# Altium PCB EE209_Team08PTH.PcbDoc
Units mm, origin at the board's own origin, x right, y up, seen from the top; angles counter-clockwise.
Board outline 108.71 x 100.84 mm, 2 copper layers (Top Layer, Bottom Layer); 51 components, 39 nets, 180 pads, 0 vias.
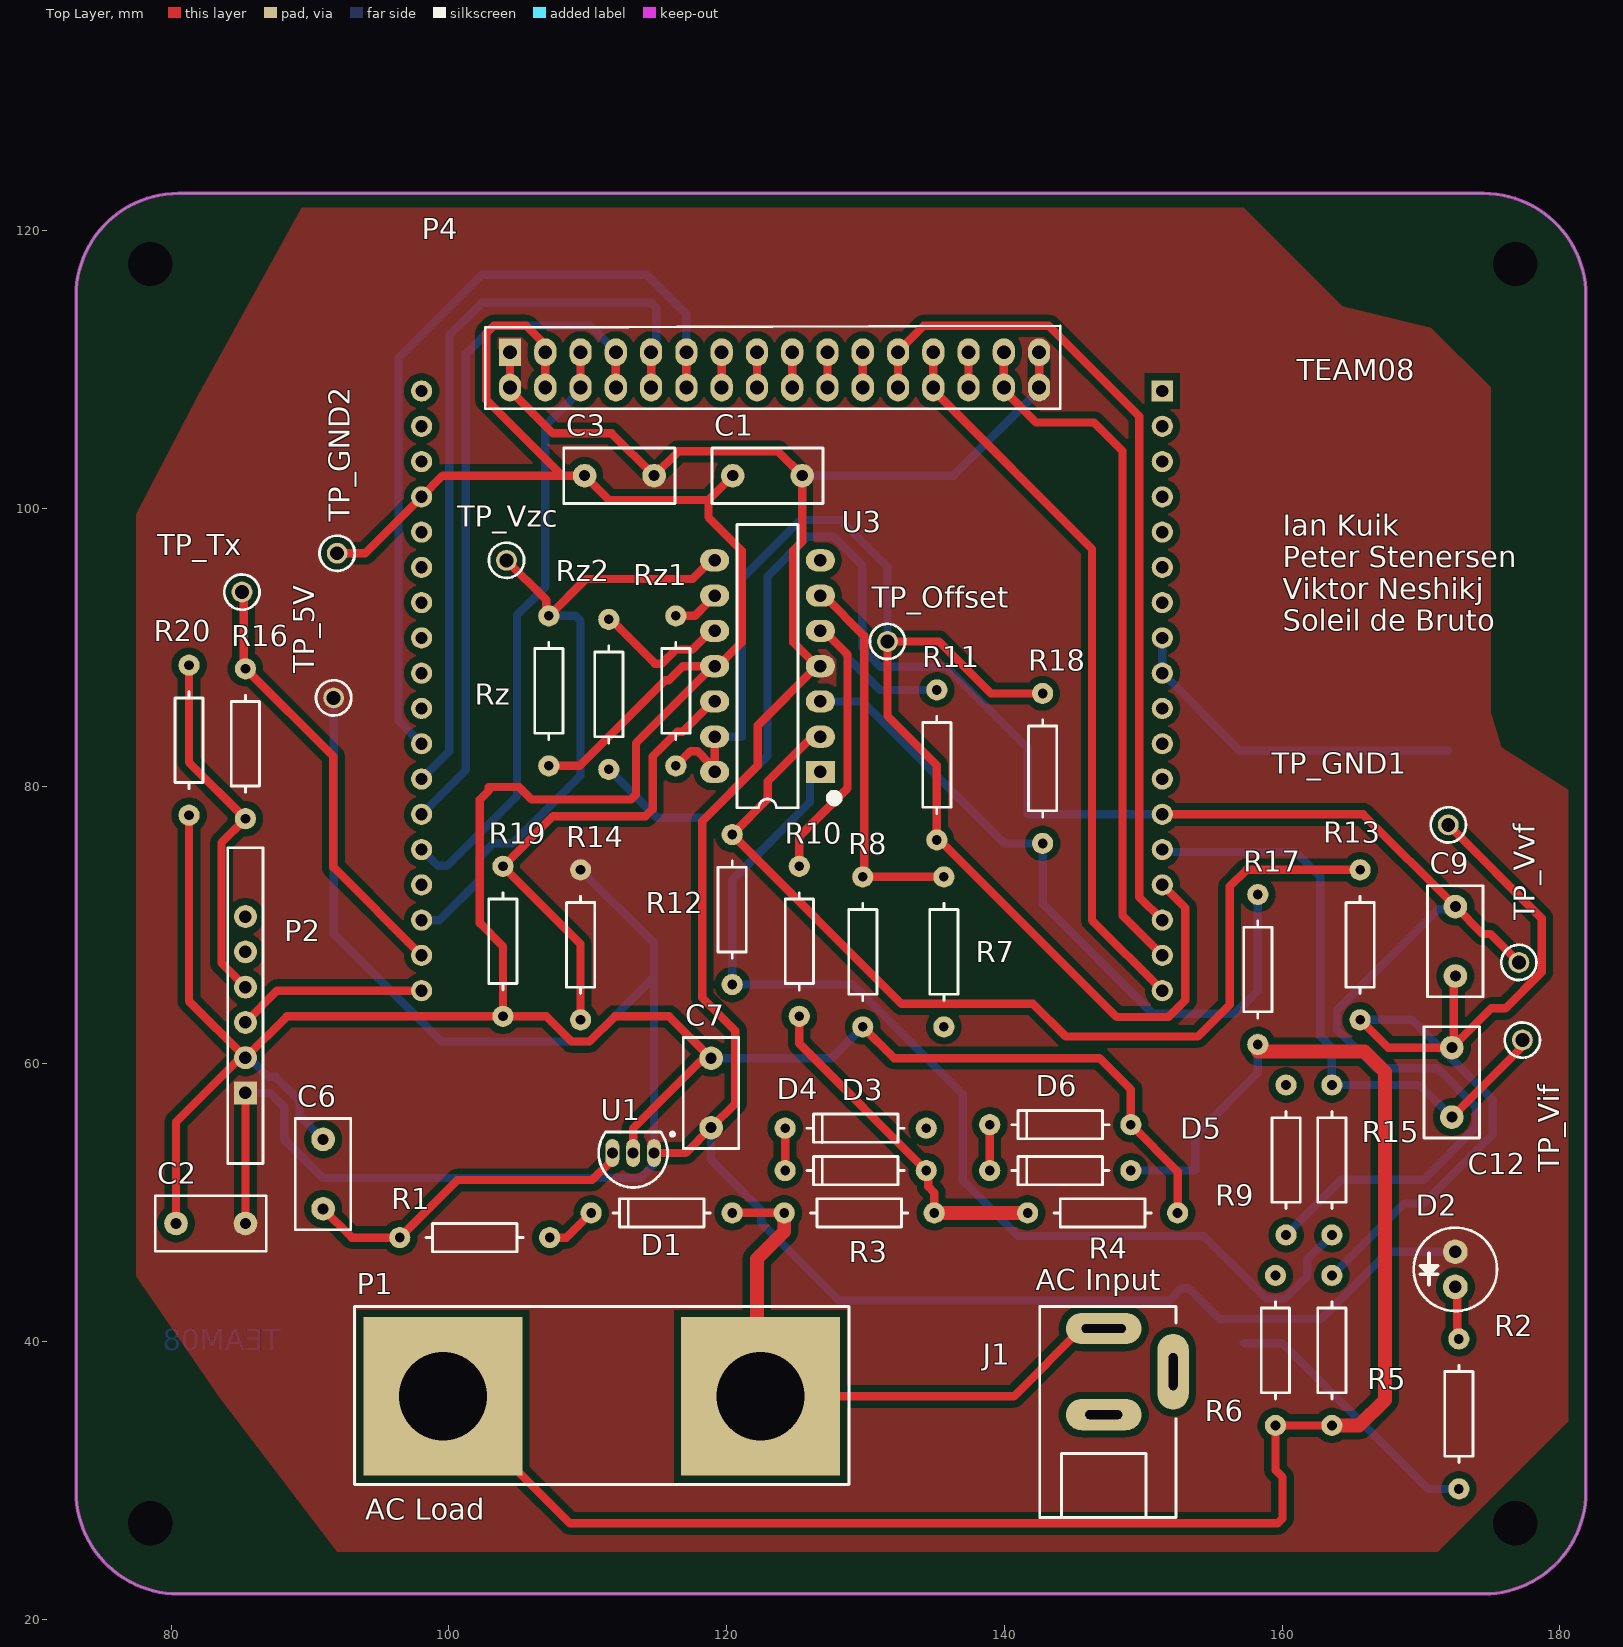
[diagram p0: Top Layer view]
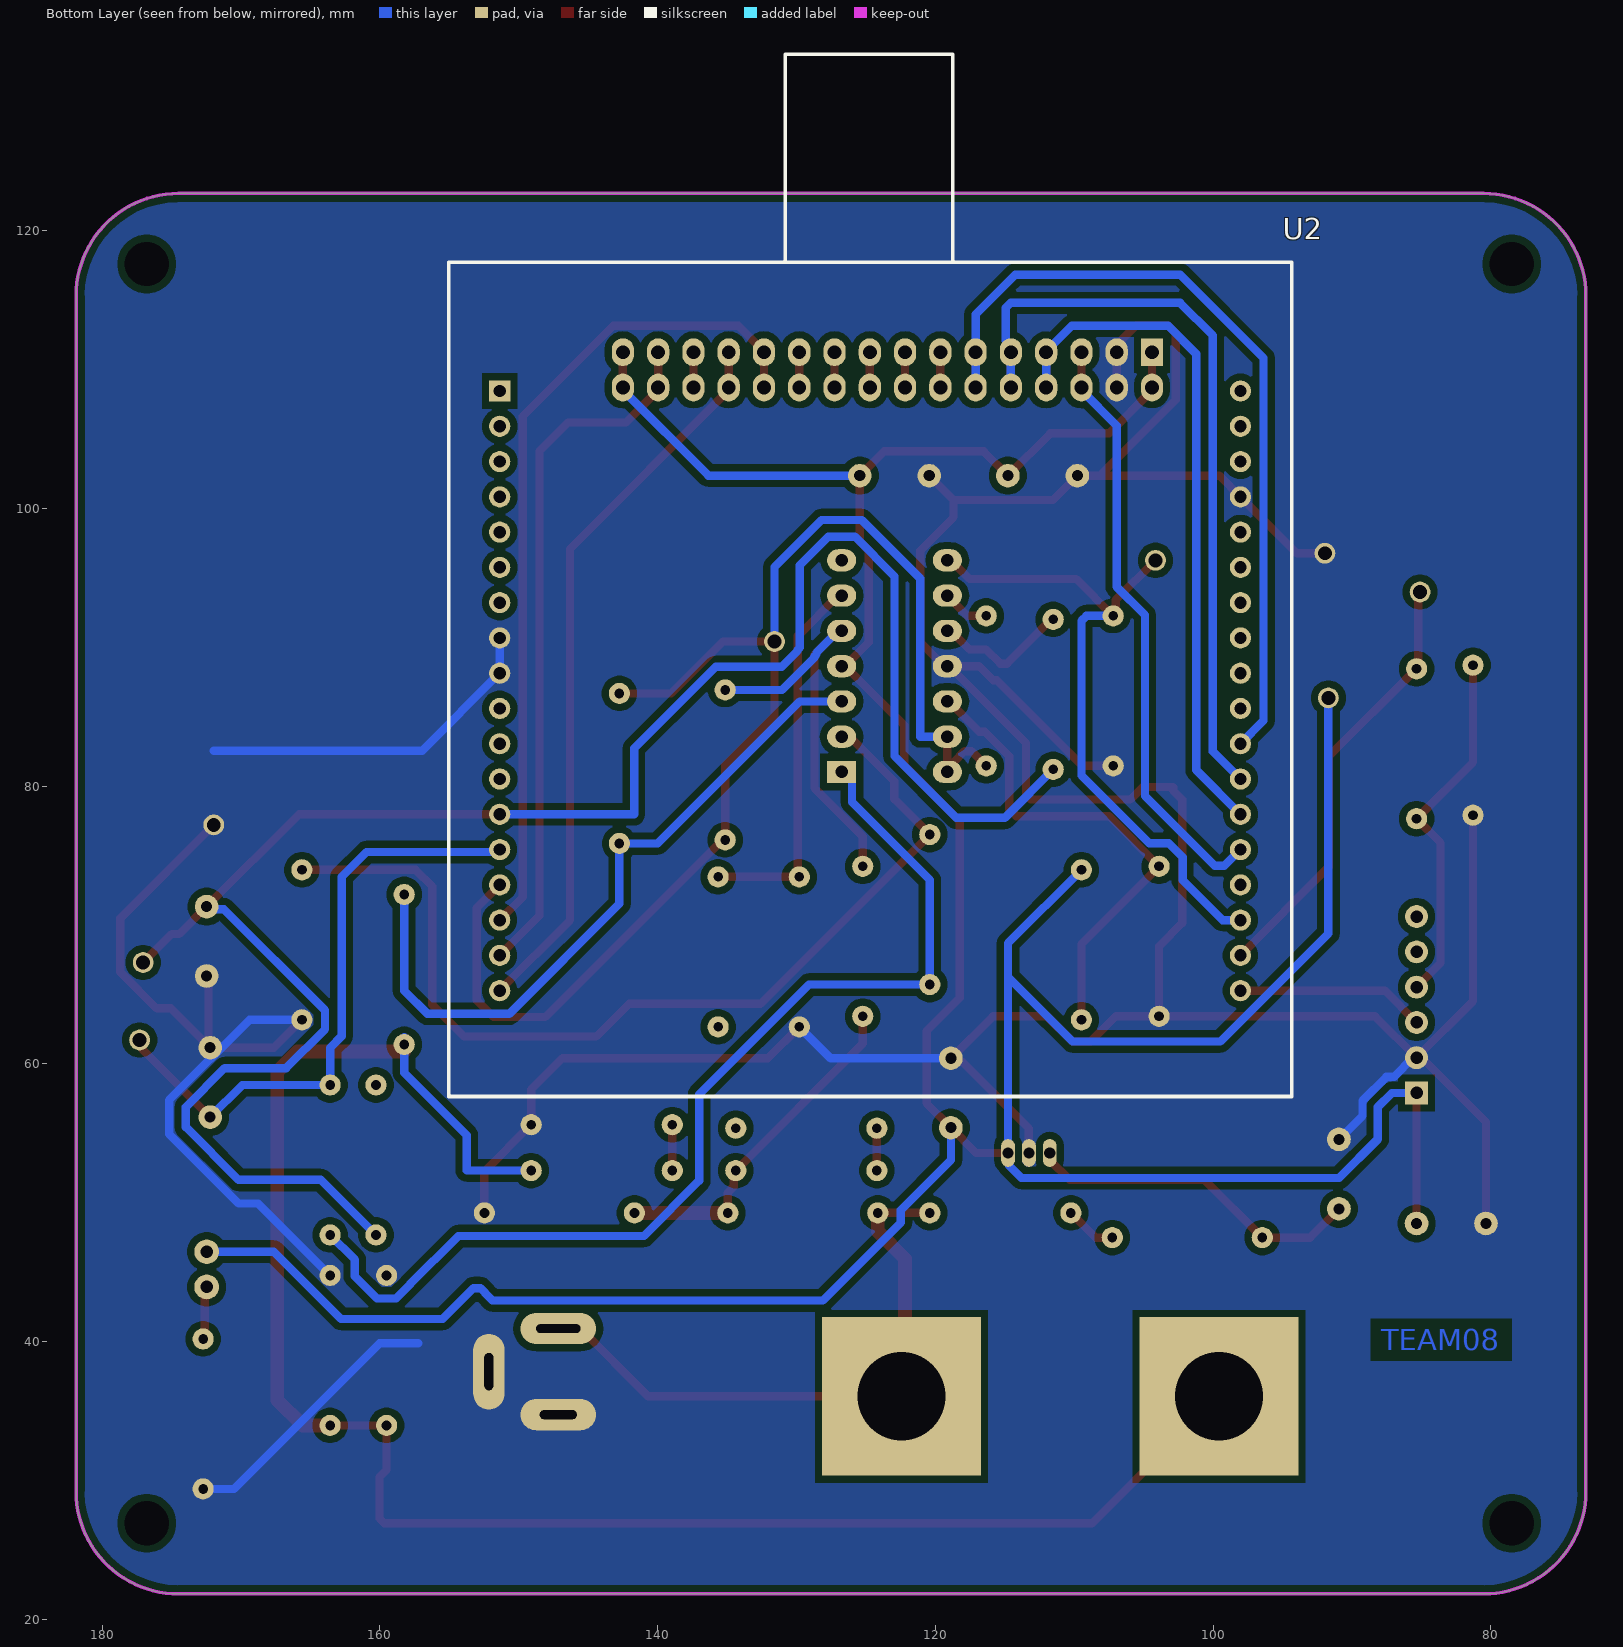
[diagram p1: Bottom Layer view, seen from below]
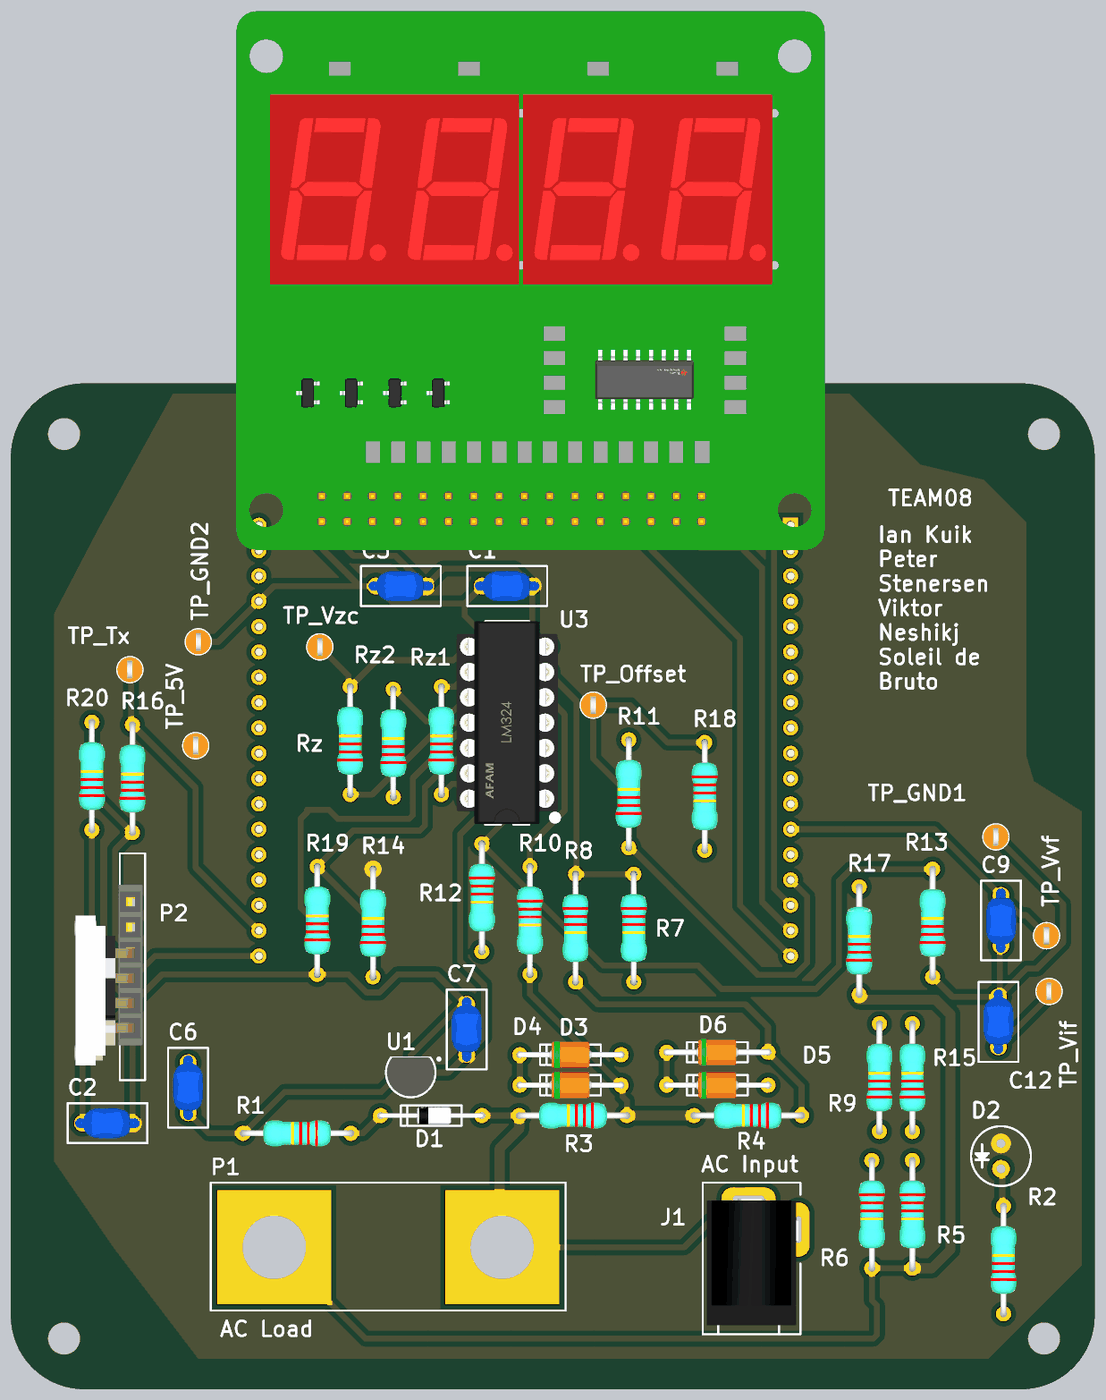
[diagram p2: 3D render of the assembled board from above, using the file's embedded part models]

## Layer stack, top to bottom
Top Solder: solder mask 0.0102, Solder Resist, Dk 3.5
Top Layer: signal copper 0.0356
Dielectric 1: dielectric 0.32, FR-4, Dk 4.8
Bottom Layer: signal copper 0.0356
Bottom Solder: solder mask 0.0102, Solder Resist, Dk 3.5

## Board outline
73.152,29.21 73.152,115.316 cw(c80.518,115.316) 80.518,122.682 174.498,122.682 cw(c174.498,115.316) 181.864,115.316 181.864,29.21 cw(c174.498,29.21) 174.498,21.844 80.518,21.844 cw(c80.518,29.21)

## Design rules (kind name [scope] priority, off if disabled: settings)
BoardOutlineClearance [All] p1: gap=0.5 ignorepadtopadclearanceinfootprint=FALSE
Clearance [All] p1: gap=0.5 ignorepadtopadclearanceinfootprint=FALSE
Height [All] p1: minheight=0 maxheight=50 prefheight=12.7
HoleSize [All] p1: absolutevalues=TRUE maxlimit=10 minlimit=0.4 maxpercent=80.000 minpercent=20.000
MinimumAnnularRing [All] p1: minimumring=0.076
MinimumSolderMaskSliver [All] p1: minsoldermaskwidth=0.1
PlaneConnect [All] p1: planeconnectstyle=Relief reliefexpansion=0.6 reliefentries=4 reliefconductorwidth=0.6 reliefairgap=0.4
PolygonConnect PolygonConnect_1 [All] p1: connectstyle=Direct reliefconductorwidth=0.6 reliefentries=4 polygonreliefangle="90 Angle" airgapwidth=0.4
RoutingVias [All] p1: holewidth=0.6 width=1 viastyle="Through Hole" minholewidth=0.5 minwidth=0.8 maxholewidth=1 maxwidth=2
SMDToCorner [All] p1: distance=157480
SilkToSilkClearance [All] p1: silktosilkclearance=0.1
SilkToSolderMaskClearance [IsPad] p1: minsilkscreentomaskgap=0.1 clearancetoexposedcopper=TRUE
SolderMaskExpansion [All] p1: expansion=0.102 istentingtop=FALSE
Width [All] p1: maxlimit=10 minlimit=0.4 preferedwidth=0.6
24 further rules are at their usual default settings.

## Classes and differential pairs
component class EE209_Schematic: C1 C2 C3 C6 C7 C9 C12 D1 D2 D3 D4 D5 D6 J1 P1 P2 P4 R6 R9 R10 R11 R12 R13 R14 R15 R16 R17 R18 R19 R20 Rz Rz1 Rz2 TP_5V TP_GND1 TP_GND2 TP_Offset TP_Tx TP_Vif TP_Vvf TP_Vzc U2 U3

## Components (designator, comment, footprint, x,y, rotation, side; value= is the part's Value field where it differs from the comment)
C1 "100nF" CCAP-5P0 122.936,102.362 r180 top
C2 "100nF" CCAP-5P0 82.844,48.514 r180 top
C3 "100nF" CCAP-5P0 112.268,102.362 r180 top
C6 "47uF" CCAP-5P0 90.932,52.07 r90 top
C7 "10uF" CCAP-5P0 118.872,57.912 r90 top
C9 "3.9nF" CCAP-5P0 172.466,68.834 r270 top
C12 "3.9nF" CCAP-5P0 172.212,58.674 r90 top
D1 "1N4148" AXIAL-DIODE-0.4 115.316,49.276 r180 top
D2 "Green" LED 172.466,45.212 r270 top
D3 "BZX79-CXVX" AXIAL-Zener-0.4 129.286,52.324 r180 top
D4 "BZX79-CXVX" AXIAL-Zener-0.4 129.286,55.372 r180 top
D5 "BZX79-CXVX" AXIAL-Zener-0.4 144.018,52.324 r180 top
D6 "BZX79-CXVX" AXIAL-Zener-0.4 144.018,55.626 r180 top
J1 "DC barrel jack" AC-Socket 147.146,34.945 r90 top value=socket
P1 "Dual Banana Plugs" "Dual Banana Plug" 110.998,36.068 r180 top
P2 "BLE Module Header" HM10_HDR1X6 85.344,57.912 r90 top
P4 "Display" Display 122.174,109.982 r180 top
R1 "33" AXIAL-0.4 101.854,47.498 r180 top
R2 "100" AXIAL-0.4 172.72,34.798 r90 top
R3 "100k" AXIAL-0.4 129.54,49.276 r180 top
R4 "4.8k" AXIAL-0.4 147.066,49.276 r180 top value=1k2
R5 "1" AXIAL-0.4 163.576,39.37 r270 top
R6 "1" AXIAL-0.4 159.512,39.37 r270 top
R7 "100k" AXIAL-0.4 135.636,68.072 r270 top
R8 "100k" AXIAL-0.4 129.794,68.072 r270 top
R9 "4.8k" AXIAL-0.4 160.274,53.086 r90 top
R10 "95..4k" AXIAL-0.4 125.222,68.834 r270 top
R11 "100k" AXIAL-0.4 135.128,81.534 r90 top
R12 "12k" AXIAL-0.4 120.396,71.12 r270 top
R13 "6.8k" AXIAL-0.4 165.608,68.58 r90 top value=10k
R14 "53.86k" AXIAL-0.4 109.474,68.58 r90 top
R15 "4.8k" AXIAL-0.4 163.576,53.086 r90 top
R16 "12" AXIAL-0.4 85.344,83.058 r90 top
R17 "6.8k" AXIAL-0.4 158.242,66.802 r90 top value=10k (schematic designator R7)
R18 "12k" AXIAL-0.4 142.748,81.28 r270 top value=100k (schematic designator R8)
R19 "39k" AXIAL-0.4 103.886,68.834 r90 top
R20 "22" AXIAL-0.4 81.28,83.312 r90 top
Rz "100k" AXIAL-0.4 107.188,86.868 r90 top
Rz1 "100k" AXIAL-0.4 116.332,86.868 r90 top
Rz2 "100k" AXIAL-0.4 111.506,86.614 r90 top
TP_5V "5003" TP_TH 91.694,86.36 r90 top
TP_GND1 "5003" TP_TH 171.958,77.216 r90 top
TP_GND2 "5003" TP_TH 91.948,96.774 r90 top
TP_Offset "5003" TP_TH 131.572,90.424 r90 top
TP_Tx "5003" TP_TH 85.09,93.98 r90 top
TP_Vif "5003" TP_TH 177.292,61.722 r270 top
TP_Vvf "5003" TP_TH 177.038,67.31 r90 top
TP_Vzc "5003" TP_TH 104.14,96.266 r90 top
U1 "L78L05ACZ" TO-92 113.26,53.594 r90 top
U2 "ATmega328PB Xplained Mini Header" "ATmeg328P Xplained" 124.694,86.868 r180 bottom
U3 "LM324" DIP-14 122.936,88.646 r180 top

## Footprints (in the part's own frame and the unit in brackets; to place one, negate y for a bottom-side part, rotate by r counter-clockwise, add the part's x,y. Pads: shape width x height; smd on the part's side, far side on the other; paste and mask are expansions set on the pad)
AC-Socket [mm]
  oval 2.25x5.45 hole 0.635 slot 3.175 at 90 deg: 1(6,0)
  oval 5.45x2.25 hole 0.635 slot 2.667 at 0 deg: 2(2.9,-5)
  oval 2.25x5.45 hole 0.635 slot 2.667 at 90 deg: 3(-0.2,0)
  silkscreen extent -7.6,-5.2 7.6,4.6, body extent -6.7,-5 6,4.2, height 10.5
"ATmeg328P Xplained" [mil]
  rect 60x60 hole 35: 1(-1050,850)
  round 60 hole 35: 2(-1050,750) 3(-1050,650) 4(-1050,550) 5(-1050,450) 6(-1050,350) 7(-1050,250) 8(-1050,150) 9(-1050,50) 10(-1050,-50) 11(-1050,-150) 12(-1050,-250) 13(-1050,-350) 14(-1050,-450) 15(-1050,-550) 16(-1050,-650) 17(-1050,-750) 18(-1050,-850) 19(1050,-850) 20(1050,-750) 21(1050,-650) 22(1050,-550) 23(1050,-450) 24(1050,-350) 25(1050,-250) 26(1050,-150) 27(1050,-50) 28(1050,50) 29(1050,150) 30(1050,250) 31(1050,350) 32(1050,450) 33(1050,550) 34(1050,650) 35(1050,750) 36(1050,850)
  silkscreen extent -1195,-1150 1195,1805, body extent -1201,-1150 1161,1845, height 452
AXIAL-0.4 [mm]
  round 1.524 hole 0.7: 1(-5.4,0) 2(5.4,0)
  silkscreen extent -3.5,-1.02 3.5,1.02, body extent -5.7,-1.3 5.7,1.3, height 2.7
AXIAL-DIODE-0.4 [mil]
  round 60 hole 27.56: 1(-200,0) 2(200,0)
  silkscreen extent -138,-40 138,40, body extent -209,-34 209,34, height 73
AXIAL-Zener-0.4 [mil]
  round 60 hole 27.56: 1(-200,0) 2(200,0)
  silkscreen extent -138,-40 138,40, body extent -211,-52 211,52, height 92
CCAP-5P0 [mm]
  round 1.7 hole 0.8: 1(-2.5,0) 2(2.5,0)
  silkscreen extent -4,-2 4,2, body extent -3.25,-1.5 3.25,1.5, height 6.5
DIP-14 [mm] "DIP; 14 Leads; Row Spacing 7.62 mm; Pitch 2.54 mm"
  rect 2.1x1.6 hole 0.9: 1(-3.81,7.62)
  oval 2.1x1.6 hole 0.9: 2(-3.81,5.08) 3(-3.81,2.54) 4(-3.81,0) 5(-3.81,-2.54) 6(-3.81,-5.08) 7(-3.81,-7.62) 8(3.81,-7.62) 9(3.81,-5.08) 10(3.81,-2.54) 11(3.81,0) 12(3.81,2.54) 13(3.81,5.08) 14(3.81,7.62)
  silkscreen extent -5.1,-10.2 2.2,10.2, body extent -5.07,-10.2 5.09,10.12, height 9.47
Display [mm]
  rect 1.6x2 hole 1: 1(17.78,-1.27)
  oval 1.6x2 hole 1: 2(17.78,1.27) 3(15.24,-1.27) 4(15.24,1.27) 5(12.7,-1.27) 6(12.7,1.27) 7(10.16,-1.27) 8(10.16,1.27) 9(7.62,-1.27) 10(7.62,1.27) 11(5.08,-1.27) 12(5.08,1.27) 13(2.54,-1.27) 14(2.54,1.27) 15(0,-1.27) 16(0,1.27) 17(-2.54,-1.27) 18(-2.54,1.27) 19(-5.08,-1.27) 20(-5.08,1.27) 21(-7.62,-1.27) 22(-7.62,1.27) 23(-10.16,-1.27) 24(-10.16,1.27) 25(-12.7,-1.27) 26(-12.7,1.27) 27(-15.24,-1.27) 28(-15.24,1.27) 29(-17.78,-1.27) 30(-17.78,1.27) 31(-20.32,-1.27) 32(-20.32,1.27)
  silkscreen extent -21.84,-3.18 19.56,2.79, body extent -32.6,-50 26.4,4, height 13
"Dual Banana Plug" [mm] "Connector; 2 Position"
  rect 11.43x11.43 hole 6.35: 1(-11.43,0) 2(11.43,0)
  silkscreen extent -17.8,-6.48 17.8,6.35, body extent -17.38,-5.99 17.43,5.99, height 5.5
HM10_HDR1X6 [mil] "Connector; Header; 6 Position"
  rect 65x65 hole 35.43: 1(0,0)
  round 65 hole 35.43: 2(100,0) 3(200,0) 4(300,0) 5(400,0) 6(500,0)
  silkscreen extent -200,-50 695,50, body extent -142,-39 571,228, height 1843
LED [mil]
  round 70 hole 35.43: 1(-50,0) 2(50,0)
  silkscreen extent -118,-118 118,118, body extent -98,-98 98,98, height 413
TO-92 [mm] "TO, Flat Index; 3 In-Line, Axial Leads; Body Dia. 4.5mm; Leads 0.51 x 0.48 mm (max)"
  oval 2x1 hole 0.8: 1(0,-1.5) 2(0,0) 3(0,1.5)
  silkscreen extent -2.48,-2.96 1.5,2.48, body extent -2.4,-2.4 1.53,2.4, height 6.73
TP_TH [mm] "Test Point, Through Hole, Dia 2.54mm"
  round 1.5 hole 1: 1(0,0)
  silkscreen extent -1.27,-1.27 1.27,1.27, body extent -1.27,-1.27 1.27,1.27, height 4.57

## Part data
C1 C2 C3 C6 C7 C9 C12: library part CerCap_TH_5P0, "TH ceramic capacitor with 5mm pitch"
D1: library part 1N4148_TH_4AX0, "1N4148 100V 200mA axial diode", Capacitance @ Vr, F="4pF @ 0V, 1MHz", Current - Average Rectified (Io)=200mA, Manufacturer="ON Semiconductor", Manufacturer Part Number=1N4148TR, Operating Temperature - Junction="-65°C ~ 175°C", Package / Case="DO-204AH, DO-35, Axial", Supplier Device Package=DO-35, Supplier Part Number 1=1N4148FSCT-ND, Base Part Number=1N4148, Category="Discrete Semiconductor Products", ComponentLink1Description=https://www.fairchildsemi.com/datasheets/1N/1N914.pdf, ComponentLink1URL=https://www.fairchildsemi.com/datasheets/1N/1N914.pdf, Diode Type=Standard, Mounting Type="Through Hole", Part Status=Active, Pricing 1="1=0.16, 10=0.109, 100=0.0592, 500=0.03648, 1000=0.02488 (NZD)", RoHS="RoHS Compliant", Speed="Small Signal =< 200mA (Io), Any Speed", Stock 1=1658049, Supplier 1=Digi-Key
D2: library part LED_TH_2P54, "Typical throughole GaAs LED with 2.54mm pitch", Manufacturer="Generic Components", Class I=Optoelectronic, Class II=LED, Published=8-Jun-2000, Publisher="Altium Limited", Revision="July-2002: Re-released for DXP Platform."
D3 D4 D5 D6: library part Zener_TH_4AX0, "Axial zener diode BZX79 series", Manufacturer="Nexperia USA Inc.", Manufacturer Part Number=BZX79-C4V7,143, Operating Temperature="-65°C ~ 200°C", Package / Case="DO-204AH, DO-35, Axial", Supplier Device Package=DO-35, Supplier Part Number 1=1727-1864-1-ND, Tolerance=±5%, Category="Discrete Semiconductor Products", ComponentLink1Description=https://assets.nexperia.com/documents/data-sheet/BZX79.pdf, ComponentLink1URL=https://assets.nexperia.com/documents/data-sheet/BZX79.pdf, Mounting Type="Through Hole", Packaging="Cut Tape (CT)", Part Status=Active, Pricing 1="1=0.23, 10=0.206, 100=0.1123, 500=0.06912, 1000=0.04714 (NZD)", RoHS="RoHS Compliant", Stock 1=8933, Supplier 1=Digi-Key
J1: library part AC_Input, "DC barrel jack connection to AC source"
P1: library part AC_Output, "Dual banana plugs connection to the AC load", LatestRevisionDate=17-Jul-2002, LatestRevisionNote="Re-released for DXP Platform.", Publisher="Altium Limited"
P2: library part BLEModule_TH, "2.54mm pitch 6-pin header for BLE module", LatestRevisionDate=17-Jul-2002, LatestRevisionNote="Re-released for DXP Platform.", Publisher="Altium Limited"
P4: "16-Pin Header Connecting Display"
R1 R2 R3 R4 R5 R6 R7 R8 R9 R10 R11 R12 R13 R14 R15 R16 R17 R18 R19 R20 Rz Rz1 Rz2: library part Res_TH_0AX4, "Through hole resistor", ComponentLink1Description=http://www.royalohm.com/pdf/product2017/PrecisionMetalMF.pdf, LatestRevisionDate=17-Jul-2002, LatestRevisionNote="Re-released for DXP Platform.", PackageReference=AXIAL-0.4, Published=8-Jun-2000, Publisher="Altium Limited"
TP_5V TP_GND1 TP_GND2 TP_Offset TP_Tx TP_Vif TP_Vvf TP_Vzc: library part TestPoint, "Test Point, Orange, 1-Pin THD, RoHS", Forward Current="3 A", Forward Voltage="1.08 V", Max Operating Temperature="150 degC", Max Surge Current="80 A", Min Operating Temperature="-65 degC", Package Quantity=500, Peak Reverse Current="600 uA", ComponentLink1Description="Manufacturer URL", ComponentLink1URL=http://www.keyelco.com/, ComponentLink2Description=Datasheet, ComponentLink2URL=http://keyelco.com/userAssets/file/M65p56.pdf, DatasheetVersion=Jun-15, Diameter="5.3 mm", Height="0.25 inch", Length="9.5 mm", Mount="Through Hole", PackageDescription="1-Pin Through Hole Device, Dia 2.54 mm", PackageReference=5003, Packaging=Bulk, Pins=2, Radiation Hardening=No, REACH SVHC="No SVHC", RoHSCompliant=true, Weight="0.01 lb", Width="0.25 inch"
U1: library part L78L05_TH_TO92, "Voltage Regulator 5V", Base Part Number=LM78L05, Current - Output=100mA, Manufacturer="ON Semiconductor", Manufacturer Part Number=LM78L05ACZX, Operating Temperature="-40°C ~ 125°C", Package / Case="TO-226-3, TO-92-3 (TO-226AA) (Formed Leads)", Supplier Device Package=TO-92-3, Supplier Part Number 1=LM78L05ACZXCT-ND, Voltage - Input (Max)=30V, Voltage - Output (Max)=-, Voltage - Output (Min/Fixed)=5V, Category="Integrated Circuits (ICs)", ComponentLink1Description=https://www.fairchildsemi.com/datasheets/MC/MC78L05A.pdf, ComponentLink1URL=https://www.fairchildsemi.com/datasheets/MC/MC78L05A.pdf, Control Features=-, Mounting Type="Through Hole", Output Configuration=Positive, Output Type=Fixed, Packaging="Cut Tape (CT)", Part Status=Active, Pricing 1="1=0.69, 10=0.517, 100=0.3226, 500=0.2207, 1000=0.16976 (NZD)", Protection Features="Over Temperature, Short Circuit", PSRR="80dB (120Hz)", RoHS="RoHS Compliant", Stock 1=7782, Supplier 1=Digi-Key, Voltage Dropout (Max)=-
U2: library part ATmega328PBXplained_TH, "Dual 18-pin headers connecting to ATmega328PB Xplained Mini", Manufacturer="Microchip Technology", Manufacturer Part Number=ATMEGA328PB-XMINI, Operating System=-, Supplier Part Number 1=ATMEGA328PB-XMINI-ND, Board Type="Evaluation Platform", Category="Development Boards, Kits, Programmers", ComponentLink1Description=http://www.microchip.com/mymicrochip/filehandler.aspx?ddocname=en589665, ComponentLink1URL=http://www.microchip.com/mymicrochip/filehandler.aspx?ddocname=en589665, Contents=Board(s), Core Processor=AVR, For Use With/Related Products=ATmega328P, Mounting Type=Fixed, Part Status=Active, Platform="ATmega328P Xplained Mini", Pricing 1="1=15.11 (NZD)", RoHS="RoHS Compliant", Stock 1=454, Supplier 1=Digi-Key, Type="MCU 8-Bit"
U3: library part LM324N_TH_DIP16, "IC OPAMP GP 14DIP", Current - Supply=1mA, Manufacturer="ON Semiconductor", Manufacturer Part Number=LM324N, Operating Temperature="0°C ~ 70°C", Package / Case="14-DIP (0.300\", 7.62mm)", Supplier Device Package=14-DIP, Supplier Part Number 1=LM324NFS-ND, Voltage - Supply, Single/Dual (±)="3 V ~ 32 V, ±1.5 V ~ 16 V", Amplifier Type="General Purpose", Base Part Number=LM324, Category="Integrated Circuits (ICs)", ComponentLink1Description=https://www.fairchildsemi.com/datasheets/LM/LM2902.pdf, ComponentLink1URL=https://www.fairchildsemi.com/datasheets/LM/LM2902.pdf, Mounting Type="Through Hole", Output Type=-, Packaging=Tube, Part Status=Active, Pricing 1="1=0.9, 10=0.775, 100=0.5789, 500=0.45482, 1000=0.35145 (NZD)", RoHS="RoHS Compliant", Slew Rate=-, Stock 1=2900, Supplier 1=Digi-Key

## Free pads (board coordinates)
  round 1.524 hole 3.2: 3(78.486,26.924) 4(176.784,26.924) 5(78.486,117.602) 6(176.784,117.602)

## Nets (pads, with @x,y where several pads share a name; then routed paths per layer and width w, separated by ;. In a path a pad name is that pad's centre, name@x,y a point inside that pad or via, vN(x,y) a via of type N, cw(c..) or ccw(c..) an arc to the next point about the centre after c; other vN are vias at no path point)
5V: C1.1 C2.1 C3.1 C7.1 D2.1 P2.1 P4.1 P4.2 P4.31 P4.32 R14.2 TP_5V.1 U1.1 U3.4 | length 284.5
  Top Layer w0.6: C2.1 P2.1 ; P4.1 P4.2 104.394,108.512 107.493,105.413 111.717,105.413 C3.1 116.518,104.112 123.686,104.112 C1.1 125.436,97.61 124.796,96.97 124.796,90.346 U3.4@126.496,88.646 ; U1.1@114.945,53.086 114.76,53.271 U1.1 117.054,53.594 C7.1 120.622,57.162 120.622,62.382 118.226,64.778 118.226,77.472 122.232,81.477 122.232,84.382 U3.4@126.496,88.646 ; U3.4 U3.4@126.496,88.646 ; P4.32@142.494,108.512 P4.32 P4.31
  Bottom Layer w0.6: P2.1 87.122,57.912 88.138,56.896 88.138,54.578 90.922,51.794 113.798,51.794 114.683,52.679 114.683,53.517 U1.1 114.76,66.257 ; TP_5V.1 91.694,69.399 99.475,61.618 110.121,61.618 114.76,66.257 ; R14.2 114.76,68.694 114.76,66.257 ; C7.1 118.872,53.086 122.478,49.48 122.478,48.588 128.096,42.97 151.892,42.97 152.401,43.479 152.401,43.503 152.753,43.854 153.25,43.854 155.469,41.635 162.792,41.635 167.638,46.482 D2.1 ; C1.1 136.344,102.362 P4.32@142.494,108.512
DS1: P4.5 P4.6 U2.23 | length 43.3
  Top Layer w0.6: P4.6 P4.5
  Bottom Layer w0.6: U2.23 99.181,74.281 99.885,74.281 104.902,79.297 104.902,92.332 106.934,94.364 106.934,105.972 109.474,108.512 P4.6
DS2: P4.7 P4.8 U2.24 | length 52
  Top Layer w0.6: P4.8 P4.7
  Bottom Layer w0.6: U2.24 101.208,81.162 101.208,111.139 103.221,113.152 110.178,113.152 112.014,111.316 P4.7 P4.8
DS3: P4.9 P4.10 U2.25 | length 57.2
  Top Layer w0.6: P4.10 P4.9
  Bottom Layer w0.6: U2.25 100.008,82.502 100.008,112.454 102.362,114.808 114.568,114.808 114.919,114.457 114.919,112.088 114.554,111.723 P4.10
DS4: P4.11 P4.12 U2.26 | length 60.7
  Top Layer w0.6: P4.12 P4.11
  Bottom Layer w0.6: U2.26 96.362,84.72 96.362,110.84 102.362,116.84 114.233,116.84 117.094,113.979 P4.11 P4.12
GND: C1.2 C2.2 C3.2 C6.2 C7.2 C9.2 C12.2 D6.1 J1.2 J1.3 P2.2 P4.3 P4.4 R2.1 R4.1 R5.1 R6.1 R8.2 R13.1 R19.1 R20.1 Rz.1 TP_GND1.1 TP_GND2.1 U1.2 U2.8 U2.9 U2.33 U3.11 | length 364.3
  Top Layer w0.6: C2.2 80.344,55.836 84.759,60.251 85.143,60.251 P2.2 ; R20.1 81.28,64.516 P2.2 ; TP_GND2.1 93.96,96.774 U2.33 99.548,102.362 108.14,102.362 ; P4.4 P4.3 106.934,111.785 105.567,113.152 103.221,113.152 102.694,112.625 102.694,107.808 108.14,102.362 ; Rz.1 109.41,81.468 115.564,87.623 115.817,87.623 116.84,88.646 U3.11@119.012,88.646 ; U1.2 113.26,55.348 118.114,60.202 118.662,60.202 C7.2 115.85,63.434 111.937,63.434 110.121,61.618 108.827,61.618 107.011,63.434 R19.1 ; C1.2 118.686,100.612 ; R8.2 132.047,60.419 146.845,60.419 149.098,58.166 D6.1 152.466,52.258 R4.1 ; R13.1 165.622,63.18 167.628,61.174 C12.2 C12.2@172.339,61.301 ; TP_GND1.1 178.688,70.486 178.688,66.627 176.067,64.006 175.044,64.006 C12.2@172.339,61.301 ; C9.2 172.339,66.207 C12.2@172.339,61.301 ; P2.2 88.326,63.434 R19.1 ; R19.1 103.886,68.472 102.224,70.134 102.224,79.048 102.87,79.694 102.87,79.944 105.048,79.944 105.948,79.044 113.119,79.044 113.47,79.395 113.47,83.104 U3.11@119.012,88.646 ; 108.14,102.362 C3.2 111.518,100.612 118.686,100.612 ; 118.686,100.612 118.686,99.36 121.076,96.97 121.076,90.346 119.376,88.646 U3.11 U3.11@119.012,88.646
  Top Layer w1: R4.1 R4.1@152.508,49.234
  Bottom Layer w0.6: P2.2 85.586,60.452 86.969,59.069 87.521,59.069 89.238,57.352 89.238,56.264 C6.2 ; C7.2 127.534,60.412 R8.2 ; U2.8 U2.9 156.952,82.55 171.958,82.55 ; 157.226,39.878 160.018,39.878 170.498,29.398 R2.1 ; R5.1 168.755,49.949 170.159,49.949 175.162,54.952 175.162,57.396 169.378,63.18 R13.1
Imeas: C12.1 R15.2 TP_Vif.1 U2.14 | length 44.8
  Top Layer w0.6: C12.1 177.12,61.082 177.12,61.55 TP_Vif.1
  Bottom Layer w0.6: U2.14 151.541,75.261 160.959,75.261 162.746,73.474 162.746,61.995 163.576,61.165 R15.2 169.9,58.486 C12.1
Isensp: D5.1 P1.2 R5.2 R6.2 R17.1 | length 129.4
  Top Layer w0.6: P1.2 108.712,26.924 159.669,26.924 160.02,27.275 160.02,30.244 159.512,30.752 R6.2 R5.2
  Top Layer w1: R17.1@158.242,60.894 165.928,60.894 167.386,59.436 167.386,35.814 165.542,33.97 R5.2
  Bottom Layer w0.6: D5.1 153.736,52.324 153.736,54.864 158.242,59.37 R17.1 R17.1@158.242,61.912
LED1: P4.13 P4.14 | length 2.5
  Top Layer w0.6: P4.14 P4.13
LED2: P4.15 P4.16 | length 2.5
  Top Layer w0.6: P4.16 P4.15
LED3: P4.17 P4.18 | length 2.5
  Top Layer w0.6: P4.18 P4.17
LED4: P4.19 P4.20 | length 2.5
  Top Layer w0.6: P4.20 P4.19
NetC6_1: C6.1 R1.2 U1.3 | length 24.5
  Top Layer w0.6: C6.1 93.004,47.498 R1.2 100.598,51.642 110.308,51.642 111.76,53.094 U1.3
NetD1_2: D1.2 R1.1 | length 3.7
  Top Layer w0.6: R1.1 108.458,47.498 D1.2
NetD2_2: D2.2 R2.2 | length 3.8
  Top Layer w0.6: D2.2 172.593,43.815 172.593,40.325 R2.2
NetD3_2: D3.2 D4.2 | length 3
  Top Layer w0.6: D3.2 D4.2
NetD5_2: D5.2 D6.2 | length 3.3
  Top Layer w0.6: D5.2 D6.2
NetP2_4: P2.4 R16.1 R20.2 | length 26.3
  Top Layer w0.6: R20.2 81.28,81.722 R16.1 83.619,75.933 83.619,67.257 P2.4
NetR7_1: R7.1 R8.1 U3.6 | length 27.6
  Top Layer w0.6: U3.6 126.996,93.726 129.896,90.826 129.896,73.574 R8.1 R7.1
NetR7_2: R17.2 R18.2 U3.3 | length 51
  Bottom Layer w0.6: U3.3 129.769,86.106 139.995,75.88 R18.2 142.748,71.544 150.676,63.616 156.58,63.616 158.242,65.278 R17.2
NetR10_1: R10.1 R11.2 U3.5 | length 29.6
  Top Layer w0.6: R10.1 125.222,76.379 128.696,79.853 128.696,89.486 126.996,91.186 U3.5
  Bottom Layer w0.6: U3.5 126.996,91.186 128.551,89.631 128.551,89.495 128.722,89.324 128.722,89.243 131.031,86.934 R11.2
NetR12_1: R12.1 R13.2 U3.2 | length 71.2
  Top Layer w0.6: U3.2 126.555,83.375 125.972,83.375 122.948,80.351 122.948,79.072 R12.1 132.582,64.334 142.053,64.334 144.411,61.976 153.924,61.976 156.21,64.262 156.21,72.774 157.416,73.98 R13.2
NetR12_2: R12.2 R15.1 U3.1 | length 76.9
  Top Layer w0.6: U3.1@125.996,80.526 126.496,81.026 U3.1
  Bottom Layer w0.6: U3.1@125.996,80.526 125.996,78.85 120.396,73.25 R12.2 129.096,65.72 136.999,57.818 136.999,51.593 140.975,47.617 154.339,47.617 157.85,44.106 157.85,44.082 158.824,43.108 160.2,43.108 161.8,44.707 161.8,45.91 R15.1
NetR14_1: R14.1 R19.2 U3.12 | length 35.8
  Top Layer w0.6: R14.1 109.474,68.646 R19.2 107.496,77.844 114.166,77.844 114.67,78.348 114.67,82.156 116.432,83.919 116.825,83.919 119.012,86.106 U3.12
NetRz1_2: Rz1.2 U3.9 | length 3.4
  Top Layer w0.6: Rz1.2 117.695,92.268 118.685,93.257 118.685,93.285 U3.9
NetRz2_2: Rz2.2 U3.10 | length 10.1
  Top Layer w0.6: Rz2.2@111.439,92.206 114.822,88.823 115.319,88.823 116.343,89.846 117.536,89.846 118.876,91.186 U3.10
OE: P4.27 P4.28 | length 2.5
  Top Layer w0.6: P4.28 P4.27
Offset: R11.1 R18.1 Rz1.1 TP_Offset.1 U2.15 U3.13 U3.14 | length 100.1
  Top Layer w0.6: Rz1.1 117.386,82.522 117.884,82.522 118.685,81.721 118.685,81.467 U3.14 U3.13 ; R18.1 139.029,86.68 135.285,90.424 TP_Offset.1 131.572,85.06 135.128,81.504 R11.1 135.324,76.134 148.082,63.376 151.813,63.376 153.026,64.59 153.026,71.236 U2.15
  Bottom Layer w0.6: U3.13 121.083,83.566 121.083,94.954 125.295,99.166 128.197,99.166 131.572,95.791 TP_Offset.1
RX: P2.3 U2.19 | length 13.6
  Top Layer w0.6: P2.3 87.63,65.278 U2.19
SH_CP: P4.23 P4.24 U2.16 | length 60.4
  Top Layer w0.6: P4.24 P4.23 132.334,111.316 134.17,113.152 143.198,113.152 149.723,106.627 149.702,106.606 149.702,72.02 U2.16
SH_DS: P4.29 P4.30 U2.17 | length 50.6
  Top Layer w0.6: P4.29 P4.30 139.954,108.512 142.269,106.197 146.445,106.197 148.502,104.14 148.502,70.68 U2.17
SH_ST: P4.25 P4.26 U2.18 | length 52.8
  Top Layer w0.6: P4.25 P4.26 134.874,108.512 146.304,97.082 146.304,70.338 U2.18
SRCLR: P4.21 P4.22 | length 2.5
  Top Layer w0.6: P4.22 P4.21
Tx: R16.2 TP_Tx.1 U2.20 | length 31.5
  Top Layer w0.6: TP_Tx.1 85.217,93.853 85.217,88.585 R16.2 91.669,82.133 91.669,74.173 U2.20
VCC: D4.1
Vin: D1.1 J1.1 P1.1 R3.2 | length 44.6
  Top Layer w0.6: D1.1 R3.2 ; P1.1 140.669,36.068 145.546,40.945 J1.1
  Top Layer w1: P1.1 122.174,36.322 122.174,45.974 124.14,47.94 R3.2
Vmeas: C9.1 R9.1 Rz2.1 TP_Vvf.1 U2.13 | length 145.9
  Top Layer w0.6: U2.13 165.822,77.978 C9.1 174.436,69.364 174.984,69.364 TP_Vvf.1
  Bottom Layer w0.6: Rz2.1@111.299,81.421 114.996,77.724 118.478,77.724 122.936,82.182 122.936,95.11 125.792,97.966 127.7,97.966 129.751,95.915 129.751,89.992 129.922,89.821 129.922,89.741 131.067,88.596 135.816,88.596 141.685,82.728 141.685,77.978 U2.13 ; R9.1 164.244,51.656 170.169,51.656 173.962,55.449 173.962,56.899 171.166,59.695 166.742,59.695 163.946,62.492 163.946,63.868 171.216,71.138 172.27,71.138 C9.1
Vsensp: D3.1 R3.1 R4.2 R10.2 | length 25.2
  Top Layer w0.6: R10.2 125.222,61.468 D3.1@134.567,52.123 ; D3.1 134.512,52.178 134.512,51.162 134.94,50.734 R3.1
  Top Layer w1: R3.1 R4.2
Vzc: Rz.2 TP_Vzc.1 U2.21 U3.8 | length 49.4
  Top Layer w0.6: TP_Vzc.1 107.011,93.395 107.011,92.445 Rz.2 109.846,94.926 117.536,94.926 118.876,96.266 U3.8
  Bottom Layer w0.6: U2.21 99.314,70.358 102.177,73.221 102.177,74.876 103.198,75.896 104.598,75.896 109.474,80.772 109.474,91.917 109.123,92.268 Rz.2 Rz.2@106.949,92.268
pads on no net: P2.5 P2.6 R7.2 R9.2 U2.1 U2.2 U2.3 U2.4 U2.5 U2.6 U2.7 U2.10 U2.11 U2.12 U2.22 U2.27 U2.28 U2.29 U2.30 U2.31 U2.32 U2.34 U2.35 U2.36 U3.7

## Polygon pours and split planes (outlines as drawn)
GND on Bottom Layer "GND_L02_P003" (solid, pour order 3): 73.406,122.174 181.229,122.174 181.229,21.59 73.406,22.098
5V on Top Layer "5V_L01_P024" (solid, remove dead copper, pour order 24): 81.918,108.084 89.408,121.666 157.226,121.666 162.052,116.84 164.338,114.554 170.688,113.03 175.006,108.712 175.006,89.662 175.006,85.344 175.768,82.804 180.594,79.756 180.594,34.29 171.196,24.892 91.948,24.892 83.531,35.932 77.47,44.704 77.47,99.568

## Keep-outs
Keep-Out Layer:
  lines w0.254: 73.152,29.21 ccw(c80.518,29.21) 80.518,21.844 174.498,21.844 ccw(c174.498,29.21) 181.864,29.21 181.864,115.316 ccw(c174.498,115.316) 174.498,122.682 117.348,122.682 80.518,122.682 ccw(c80.518,115.316) 73.152,115.316 73.152,29.21

## Other copper
Bottom Layer:
  text "TEAM08" at 87.884,39.37 h1.52

## Silkscreen, mask and mechanical layers (free items; w line width, h text height)
Top Overlay:
  text "TEAM08" at 161.036,109.22 h1.52
  text "Ian Kuik / Peter Stenersen / Viktor Neshikj / Soleil de Bruto" at 160.02,91.186 h1.52
  text "AC Input" at 142.24,43.688 h1.52
  text "AC Load" at 93.98,27.178 h1.52
Mechanical 1:
  lines w0.254: 73.152,29.21 ccw(c80.518,29.21) 80.518,21.844 174.498,21.844 ccw(c174.498,29.21) 181.864,29.21 181.864,115.316 ccw(c174.498,115.316) 174.498,122.682 117.348,122.682 80.518,122.682 ccw(c80.518,115.316) 73.152,115.316 73.152,29.21